# Altium PCB RF_Wattmeter.PcbDoc
Units mm, origin at the board's own origin, x right, y up, seen from the top; angles counter-clockwise.
Board outline 100.1 x 40.1 mm, 2 copper layers (Top Layer, Bottom Layer); 64 components, 40 nets, 196 pads, 267 vias.
Unrouted connection lines stored in the file: 4.
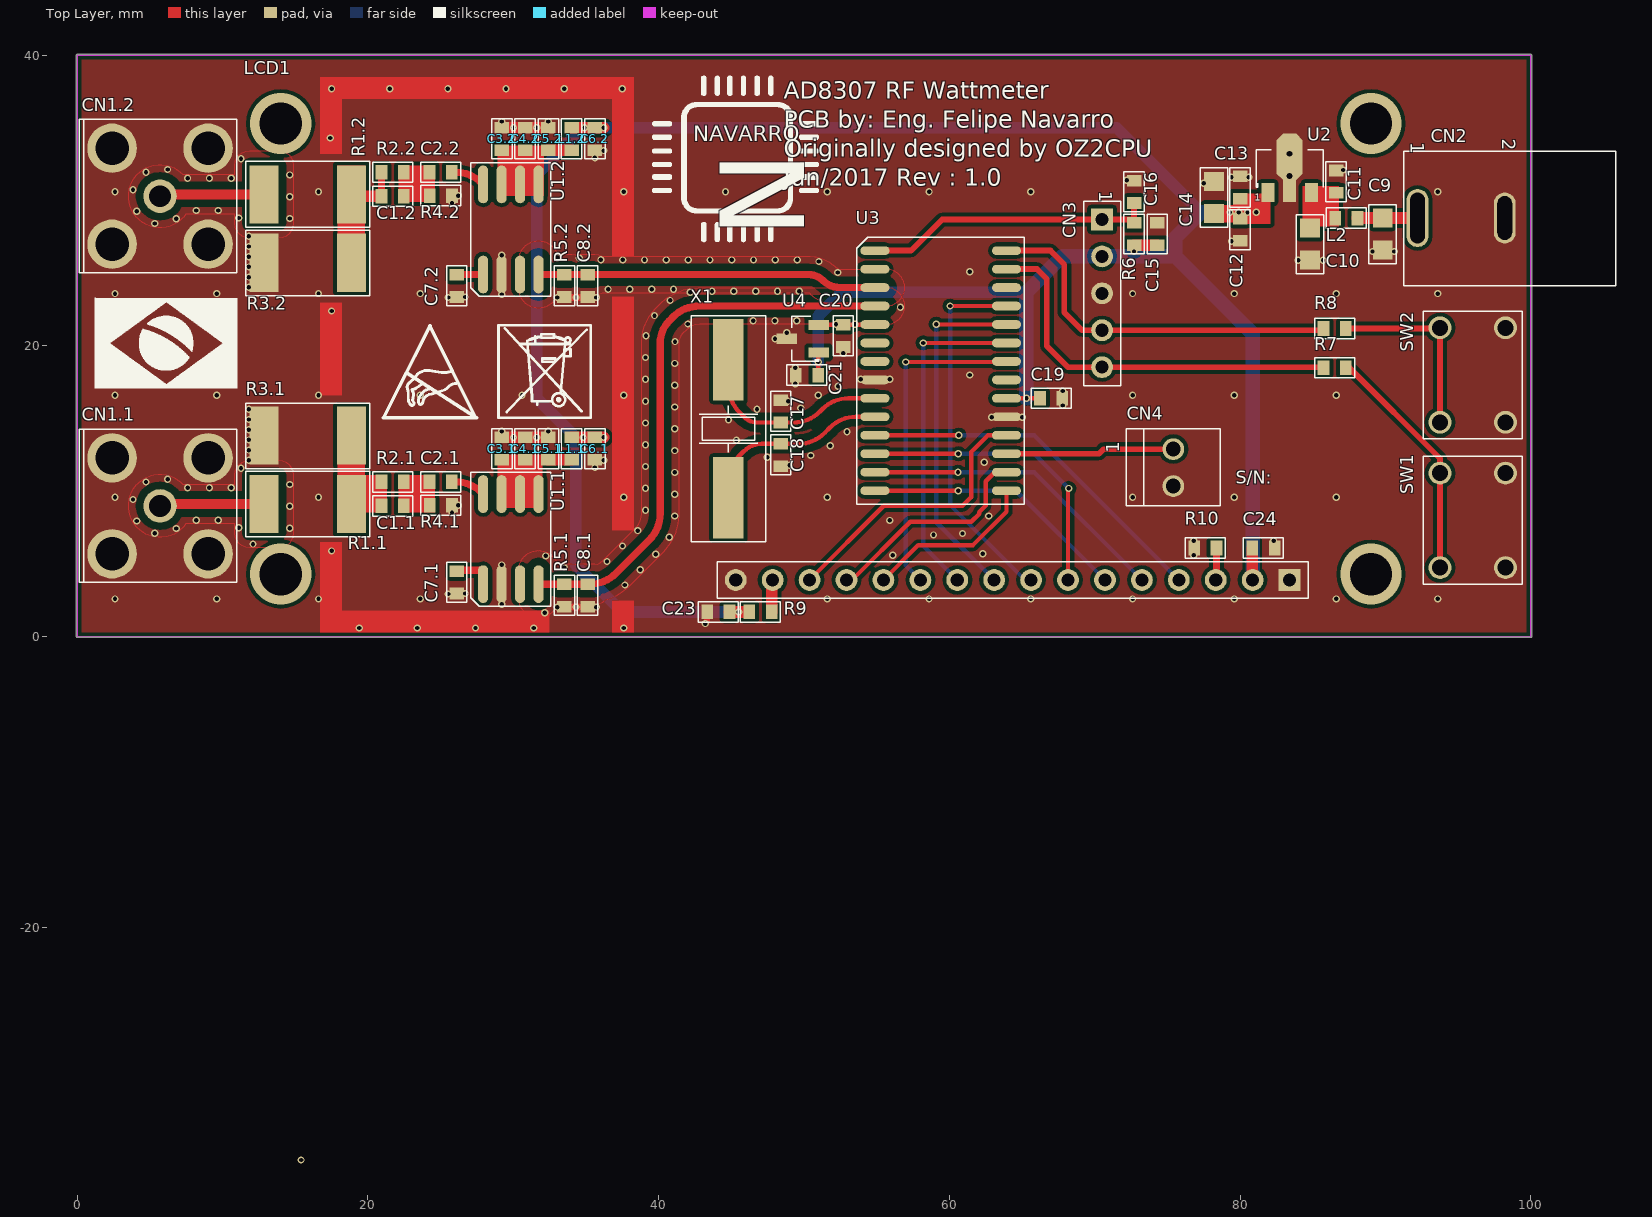
[diagram p0: Top Layer view]
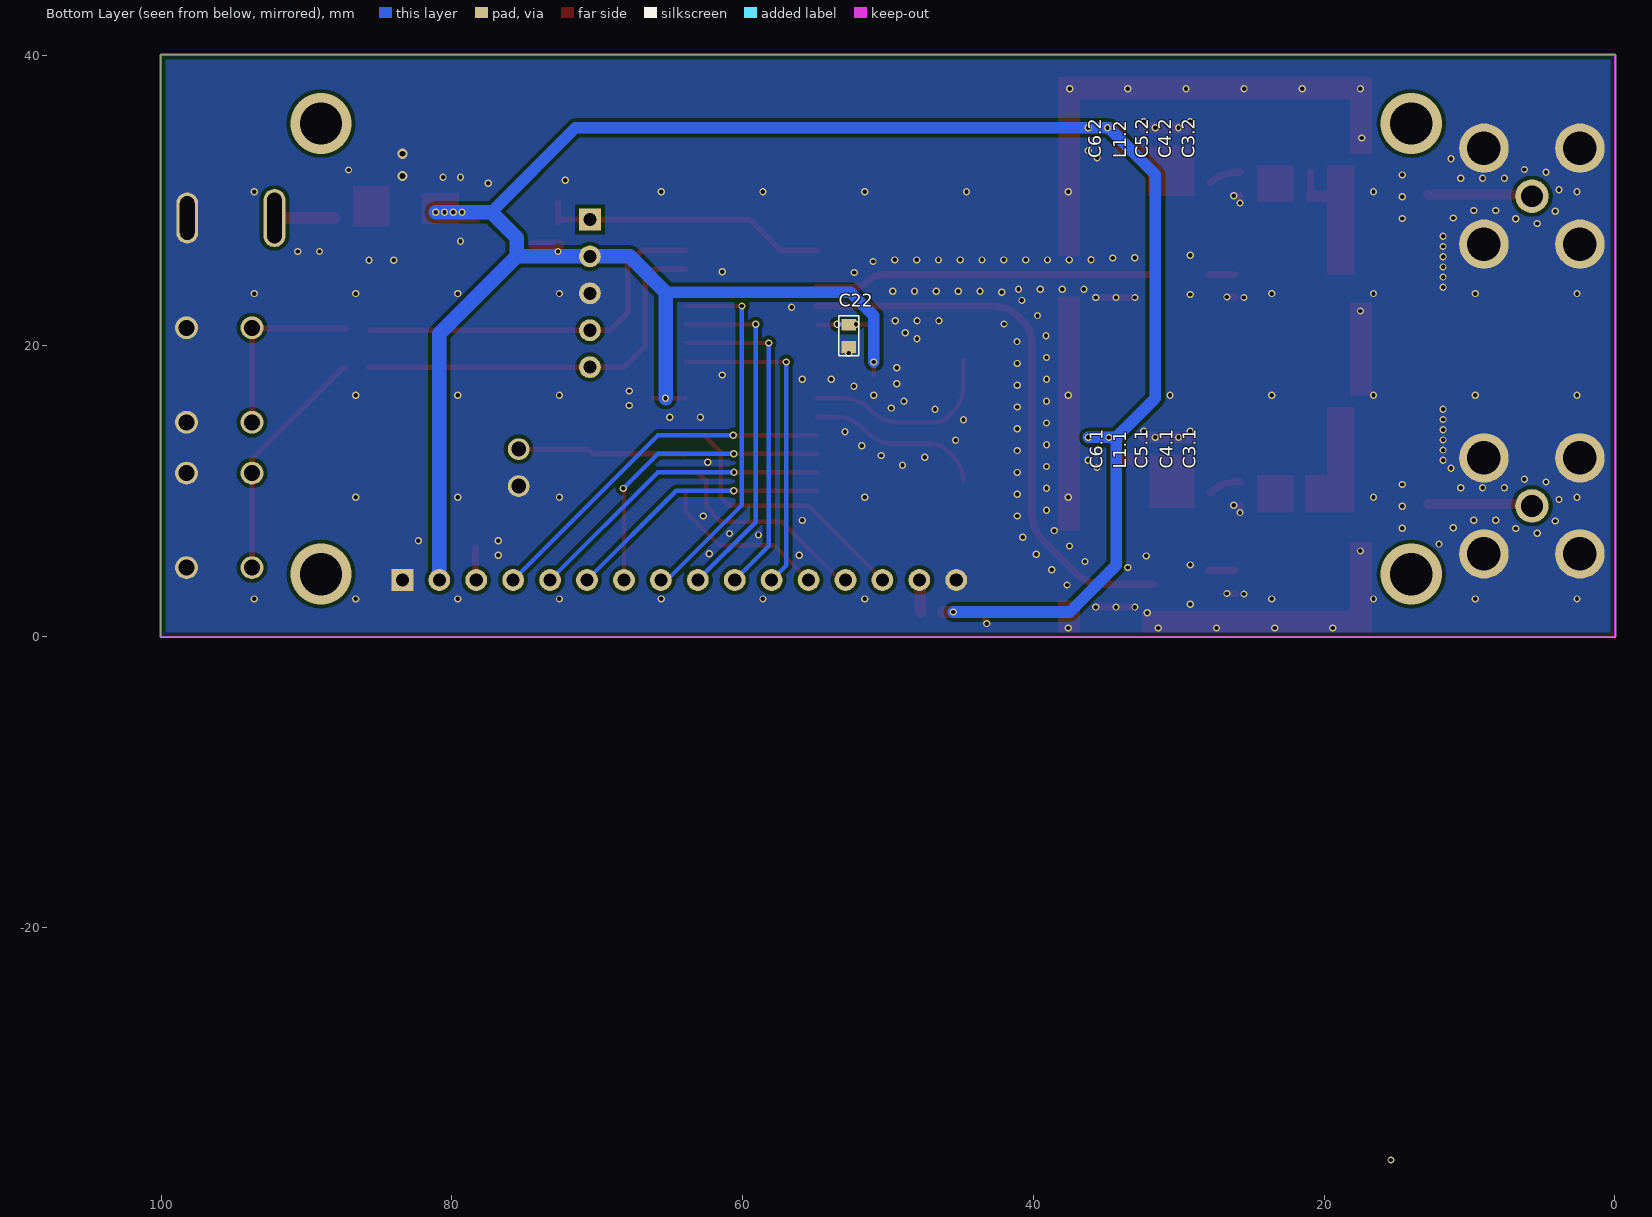
[diagram p1: Bottom Layer view, seen from below]

## Layer stack, top to bottom
Top Solder: solder mask 0.0102, Solder Resist, Dk 3.5
Top Layer: signal copper 0.0356
Dielectric 1: dielectric 0.32, FR-4, Dk 4.8
Bottom Layer: signal copper 0.0356
Bottom Solder: solder mask 0.0102, Solder Resist, Dk 3.5

## Board outline
0,-0.05 cw(c0,0) -0.05,0 -0.05,40 cw(c0,40) 0,40.05 100,40.05 cw(c100,40) 100.05,40 100.05,0 cw(c100,0) 100,-0.05

## Design rules (kind name [scope] priority, off if disabled: settings)
Clearance [All] p1: gap=0.254 ignorepadtopadclearanceinfootprint=FALSE except(0: Arc-Hole Track-Hole SMDPad-Hole THPad-Hole Via-Hole Fill-Hole Poly-Hole Region-Hole Text-Hole)
PolygonConnect [All] p1: connectstyle=Direct reliefconductorwidth=0.254 reliefentries=4 polygonreliefangle="90 Angle" airgapwidth=0.254
RoutingVias [All] p1: holewidth=0.711 width=1.27 viastyle="Through Hole" minholewidth=0.711 minwidth=1.27 maxholewidth=0.711 maxwidth=1.27
SolderMaskExpansion [All] p1: expansion=0.102
Width [All] p1: maxlimit=2 minlimit=0.254 preferedwidth=0.254
30 further rules are at their usual default settings.

## Classes and differential pairs
net class OUT[1..2]: OUT1 OUT2
component class PIC: C9 C10 C11 C12 C13 C14 C15 C16 C17 C18 C19 C20 C21 C22 C23 C24 CN2 CN3 CN4 L2 LCD1 R6 R7 R8 R9 R10 SW1 SW2 U2 U3 U4 X1
channel class AD8307: AD83071 AD83072
component class AD83072: C1.2 C2.2 C3.2 C4.2 C5.2 C6.2 C7.2 C8.2 CN1.2 L1.2 R1.2 R2.2 R3.2 R4.2 R5.2 U1.2
component class AD83071: C1.1 C2.1 C3.1 C4.1 C5.1 C6.1 C7.1 C8.1 CN1.1 L1.1 R1.1 R2.1 R3.1 R4.1 R5.1 U1.1

## Components (designator, comment, footprint, x,y, rotation, side; value= is the part's Value field where it differs from the comment)
C1.1 "Capacitor Cerâmico" CC0603 21.702,9 r0 top value=8.2pF (schematic designator C1)
C1.2 "Capacitor Cerâmico" CC0603 21.702,30.3 r0 top value=8.2pF (schematic designator C1)
C2.1 "Capacitor Cerâmico" CC0603 25.004,10.651 r0 top value=100nF (schematic designator C2)
C2.2 "Capacitor Cerâmico" CC0603 25.004,31.951 r0 top value=100nF (schematic designator C2)
C3.1 "Capacitor Cerâmico" CC0603 29.212,12.937 r270 top value=100nF (schematic designator C3)
C3.2 "Capacitor Cerâmico" CC0603 29.212,34.237 r270 top value=100nF (schematic designator C3)
C4.1 "Capacitor Cerâmico" CC0603 30.812,12.937 r270 top value=100nF (schematic designator C4)
C4.2 "Capacitor Cerâmico" CC0603 30.812,34.237 r270 top value=100nF (schematic designator C4)
C5.1 "Capacitor Cerâmico" CC0603 32.412,12.937 r270 top value=1nF (schematic designator C5)
C5.2 "Capacitor Cerâmico" CC0603 32.412,34.237 r270 top value=1nF (schematic designator C5)
C6.1 "Capacitor Cerâmico" CC0603 35.612,12.937 r90 top value=100nF (schematic designator C6)
C6.2 "Capacitor Cerâmico" CC0603 35.612,34.237 r90 top value=100nF (schematic designator C6)
C7.1 "Capacitor Cerâmico" CC0603 26.112,3.737 r90 top value=100nF (schematic designator C7)
C7.2 "Capacitor Cerâmico" CC0603 26.112,24.137 r90 top value=100nF (schematic designator C7)
C8.1 "Capacitor Cerâmico" CC0603 35.112,2.837 r90 top value=100nF (schematic designator C8)
C8.2 "Capacitor Cerâmico" CC0603 35.112,24.137 r90 top value=100nF (schematic designator C8)
C9 "Capacitor Cerâmico" CC0805 89.8,27.7 r90 top value=10uF
C10 "Capacitor Cerâmico" CC0805 84.8,27 r90 top value=10uF
C11 "Capacitor Cerâmico" CC0603 86.6,31.3 r270 top value=100nF
C12 "Capacitor Cerâmico" CC0603 80,28 r90 top value=100nF
C13 "Capacitor Cerâmico" CC0603 80,30.9 r270 top value=1uF
C14 "Capacitor Cerâmico" CC0805 78.2,30.2 r270 top value=10uF
C15 "Capacitor Cerâmico" CC0603 74.3,27.7 r270 top value=100nF
C16 "Capacitor Cerâmico" CC0603 72.7,30.6 r270 top value=100nF
C17 "Capacitor Cerâmico" CC0603 48.4,15.5 r270 top value=36pF
C18 "Capacitor Cerâmico" CC0603 48.4,12.5 r90 top value=36pF
C19 "Capacitor Cerâmico" CC0603 67,16.4 r180 top value=100nF
C20 "Capacitor Cerâmico" CC0603 52.7,20.7 r90 top value=100nF
C21 "Capacitor Cerâmico" CC0603 50.2,18 r0 top value=100nF
C22 "Capacitor Cerâmico" CC0603 52.7,20.7 r90 bottom value=100nF
C23 "Capacitor Cerâmico" CC0603 44.1,1.7 r0 top value=100nF
C24 "Capacitor Cerâmico" CC0603 81.6,6.1 r180 top value=100nF
CN1.1 "Conn BNC" "CONN BNC-JACK-TE-5-1634556-0" 5.7,9 r90 top value="Jack BNC" (schematic designator CN1)
CN1.2 "Conn BNC" "CONN BNC-JACK-TE-5-1634556-0" 5.7,30.3 r90 top value="Jack BNC" (schematic designator CN1)
CN2 "Jack-2Pol" CONN_JACK-FONTE 98.2,28.8 r270 top locked value="Receptáculo - 2Pol"
CN3 "ICS" "CONN HDR1X5" 70.5,28.7 r270 top value="Barra de 40 pinos - ATENÇÃO"
CN4 "Conector KK" "CONN HDR2-POL P.100" 75.4,12.9 r90 top value="Macho - 2 Polos"
L1.1 "Bead" CC0603 34.012,12.937 r90 top value=1K@100MHz (schematic designator L1)
L1.2 "Bead" CC0603 34.012,34.237 r90 top value=1K@100MHz (schematic designator L1)
L2 "Bead" CC0603 87.3,28.8 r180 top value=1K@100MHz
LCD1 "LCD1602" LCD-1602 51.5,19.8 r180 top locked value="Display LCD de LED"
R1.1 "Resistor" CC2512 15.86,9.127 r180 top value=33R (schematic designator R1)
R1.2 "Resistor" CC2512 15.86,30.427 r180 top value=33R (schematic designator R1)
R2.1 "Resistor" CC0603 21.702,10.651 r180 top value=68R (schematic designator R2)
R2.2 "Resistor" CC0603 21.702,31.951 r180 top value=68R (schematic designator R2)
R3.1 "Resistor" CC2512 15.86,13.828 r0 top value=33R (schematic designator R3)
R3.2 "Resistor" CC2512 15.86,25.728 r0 top value=33R (schematic designator R3)
R4.1 "Resistor" CC0603 25.012,9.037 r180 top value=47R (schematic designator R4)
R4.2 "Resistor" CC0603 25.012,30.337 r180 top value=47R (schematic designator R4)
R5.1 "Resistor" CC0603 33.512,2.837 r90 top value=470K (schematic designator R5)
R5.2 "Resistor" CC0603 33.512,24.137 r90 top value=470K (schematic designator R5)
R6 "Resistor" CC0603 72.7,27.7 r270 top value=10K
R7 "Resistor" CC0603 86.5,18.5 r0 top value=1K
R8 "Resistor" CC0603 86.5,21.2 r180 top value=1K
R9 "Resistor" CC0603 47,1.7 r180 top value=220R
R10 "Resistor" CC0603 77.6,6.1 r0 top value=100R
SW1 "Top Switch" SWITCH-TACTIL_6x6 96,8 r90 top value=NA
SW2 "Top Switch" SWITCH-TACTIL_6x6 96,18 r90 top value=NA
U1.1 "AD8307" SOIC-8N 29.83,6.714 r90 top value=Memória (schematic designator U1)
U1.2 "AD8307" SOIC-8N 29.83,28.014 r90 top value=Memória (schematic designator U1)
U2 "MC78L05A" SOT-89-3N 83.4,32.2 r90 top
U3 "PIC16F876A" SOIC-28N 59.4,18.3 r0 top
U4 "REF3325" SOT-23-3N 49.9,20.5 r180 top
X1 "4Mhz" HC/49US 44.8,14.3 r270 top value=20pF/40R

## Footprints (in the part's own frame and the unit in brackets; to place one, negate y for a bottom-side part, rotate by r counter-clockwise, add the part's x,y. Pads: shape width x height; smd on the part's side, far side on the other; paste and mask are expansions set on the pad)
CC0603 [mm] "Chip Resistor, 2-Leads, Body 1,6x0,8mm, IPC Medium Density"
  rect 0.8x1 smd: 1(-0.77,0) 2(0.77,0)
  silkscreen extent -1.38,-0.7 1.38,0.7, body extent -0.8,-0.42 0.8,0.43, height 0.45
CC0805 [mm] "Chip Resistor, 2-Leads, Body 2,0x1,2mm, IPC Medium Density"
  rect 1.3x1.35 smd: 1(-1.1,0) 2(1.1,0)
  silkscreen extent -2.05,-0.95 2.02,0.95, body extent -1,-0.62 1,0.63, height 0.6
CC2512 [mm] "Chip Resistor, 2-Leads, Body 6,5x3,3mm, IPC High Density"
  rect 2x4 smd: 1(-3,0) 2(3,0)
  silkscreen extent -4.26,-2.26 4.25,2.25, body extent -3.17,-1.6 3.18,1.6, height 0.47
"CONN BNC-JACK-TE-5-1634556-0" [mm]
  round 2.3 hole 1.5: 1(0,0)
  round 3.4 hole 2.3: 2(-3.3,-3.3) 2(-3.3,3.3) 2(3.3,-3.3) 2(3.3,3.3)
  silkscreen extent -5.26,-5.26 5.28,5.55, body extent -7.51,-5.09 7.29,22.74, height 11.71
"CONN HDR1X5" [mm] "Connector; Header; 5 Position, Pitch 2.54mm"
  rect 1.5x1.5 hole 0.9: 1(0,0)
  round 1.5 hole 0.9: 2(2.54,0) 3(5.08,0) 4(7.62,0) 5(10.16,0)
  silkscreen extent -1.27,-1.27 11.43,1.27, body extent -1.27,-1.27 11.43,1.27, height 8.51
"CONN HDR2-POL P.100" [mm] "Conector KK Macho, Pitch 2.54mm, 2 Polos"
  round 1.5 hole 1.02: 1(0,0) 2(-2.54,0)
  silkscreen extent -3.89,-3.23 1.4,3.25, body extent -3.82,-3.12 1.26,3.23, height 10.69
CONN_JACK-FONTE [mm]
  oval 4x1.5 hole 1 slot 3.5 at 0 deg: 1(0,-6)
  oval 3.5x1.5 hole 1 slot 3 at 0 deg: 2(0,0)
  silkscreen extent -4.59,-6.94 4.64,7.62, body extent -4.5,-6 4.5,7.73, height 11
HC/49US [mm] "Crystal, 2-Leads, Body 11,5x4,7mm, IPC Low Density"
  rect 5.6x2.1 smd: 1(-4.75,0) 2(4.75,0)
  silkscreen extent -7.77,-2.58 7.78,2.58, body extent -6.15,-2.25 6.15,2.25, height 5.18
LCD-1602 [mm]
  rect 1.5x1.5 hole 0.9: 1(-31.9,15.9)
  round 1.5 hole 0.9: 2(-29.36,15.9) 3(-26.82,15.9) 4(-24.28,15.9) 5(-21.74,15.9) 6(-19.2,15.9) 7(-16.66,15.9) 8(-14.12,15.9) 9(-11.58,15.9) 10(-9.04,15.9) 11(-6.5,15.9) 12(-3.96,15.9) 13(-1.42,15.9) 14(1.12,15.9) 15(3.66,15.9) 16(6.2,15.9)
  silkscreen extent -33.17,14.63 7.47,17.17, body extent -40,-18 40,18, height 20.7
SOIC-8N [mm] "SOIC, 8-Leads, Body 4.9x3.9mm, Pitch 1.27mm, IPC Medium Density"
  oval 2.6x0.7 smd: 1(-3.1,1.905) 2(-3.1,0.635) 3(-3.1,-0.635) 4(-3.1,-1.905) 5(3.1,-1.905) 6(3.1,-0.635) 7(3.1,0.635) 8(3.1,1.905)
  silkscreen extent -4.61,-2.73 4.6,2.76, body extent -2.9,-2.4 2.9,2.4, height 1.75
SOIC-28N [mm] "SOIC, 28-Leads, Body 18,1x7,6mm (max), Pitch 1,27mm, IPC High Density"
  oval 2x0.6 smd: 1(-4.525,8.255) 2(-4.525,6.985) 3(-4.525,5.715) 4(-4.525,4.445) 5(-4.525,3.175) 6(-4.525,1.905) 7(-4.525,0.635) 8(-4.525,-0.635) 9(-4.525,-1.905) 10(-4.525,-3.175) 11(-4.525,-4.445) 12(-4.525,-5.715) 13(-4.525,-6.985) 14(-4.525,-8.255) 15(4.525,-8.255) 16(4.525,-6.985) 17(4.525,-5.715) 18(4.525,-4.445) 19(4.525,-3.175) 20(4.525,-1.905) 21(4.525,-0.635) 22(4.525,0.635) 23(4.525,1.905) 24(4.525,3.175) 25(4.525,4.445) 26(4.525,5.715) 27(4.525,6.985) 28(4.525,8.255)
  silkscreen extent -5.77,-9.19 5.75,9.18, body extent -5.15,-8.95 5.15,8.95, height 2.65
SOT-23-3N [mm] "SOT23, 3-Leads, Body 3,1x2,7mm (max), Pitch 0,95mm, IPC Medium Density"
  rect 1.4x0.7 smd: 1(-1.1,0.95) 2(-1.1,-0.95) 3(1.1,0)
  silkscreen extent -1.1,-1.55 0.75,1.55, body extent -1.4,-1.45 1.4,1.45, height 1.25
SOT-89-3N [mm] "SOT89, 3-Leads, Body 4,5x2,4mm (max), Pitch 1,50mm, Lead Span 4,1mm, IPC High Density"
  rect 1.3x0.9 smd: 1(-1.65,1.5) 3(-1.65,-1.5)
  rect 1.5x0.9 smd: 2(-1.55,0)
  oct 3.2x1.8 smd: 2(0.8,0)
  silkscreen extent -1.3,-2.3 1.3,2.3, body extent -2.18,-2.25 1.75,2.25, height 1.4
SWITCH-TACTIL_6x6 [mm]
  round 1.575 hole 1.1 paste+0 mask+0.102: 1(-3.25,2.25) 2(3.25,2.25) 3(-3.25,-2.25) 4(3.25,-2.25)
  silkscreen extent -4.4,-3.4 4.4,3.4, body extent -3,-3 3,3, height 16.6

## Part data
C1.1 C1.2: library part "Cap 8.2nF 50V 0603 X7R", "Capacitor (Semiconductor SIM Model)", Supplier Part Number 1=1276-2119-1-ND, Tolerância=±10%, ChinesePrice=0,00200, Chinês=Local, ComponentLink1Description=Datasheet, ComponentLink1URL=D:\Tecnoclade\Datasheet\!DataMissing.pdf, Corrente=*A, Obs=X7R, Potência=*W, Supplier 1=Digi-Key, Tensão=50V
C2.1 C2.2 C3.1 C3.2 C4.1 C4.2 C6.1 C6.2 C7.1 C7.2 C8.1 C8.2 C11 C12 C15 C16 C19 C20 C21 C22 C23 C24: library part "Cap 100nF 50V 0603 X7R", "Capacitor (Semiconductor SIM Model)", Supplier Part Number 1=1276-1000-1-ND, Tolerância=±10%, ChinesePrice=0,00250, Chinês=Local, ComponentLink1Description=Datasheet, ComponentLink1URL=D:\Tecnoclade\Datasheet\!DataMissing.pdf, Corrente=*A, Obs=X7R, Potência=*W, Supplier 1=Digi-Key, Tensão=50V
C5.1 C5.2: library part "Cap 1nF 50V 0603 X7R", "Capacitor (Semiconductor SIM Model)", Supplier Part Number 1=1276-1916-1-ND, Tolerância=±10%, ChinesePrice=0,00000, Chinês=-----, ComponentLink1Description=Datasheet, ComponentLink1URL=D:\Tecnoclade\Datasheet\!DataMissing.pdf, Corrente=*A, Obs=X7R, Potência=*W, Supplier 1=Digi-Key, Tensão=50V
C9 C10 C14: library part "Cap 10uF 25V 0805 X5R", "Capacitor (Semiconductor SIM Model)", Supplier Part Number 1=587-2985-1-ND, Tolerância=±10%, ChinesePrice=0,02620, Chinês=Local, ComponentLink1Description=Datasheet, ComponentLink1URL=D:\Tecnoclade\Datasheet\!DataMissing.pdf, Corrente=*A, Obs=X5R, Potência=*W, Supplier 1=Digi-Key, Tensão=25V
C13: library part "Cap 1uF 50V 0603 X5R", "Capacitor (Semiconductor SIM Model)", Supplier Part Number 1=587-2400-1-ND, Tolerância=±10%, ChinesePrice=0,01100, Chinês=Local, ComponentLink1Description=Datasheet, ComponentLink1URL=D:\Tecnoclade\Datasheet\!DataMissing.pdf, Corrente=*A, Obs=X5R, Potência=*W, Supplier 1=Digi-Key, Tensão=50V
C17 C18: library part "Cap - $Val $V $Footprint $Classe_1", "Capacitor (Semiconductor SIM Model)", Supplier Part Number 1=1276-1187-1-ND, Tolerância=±*%, ChinesePrice=0,00000, Chinês=----, ComponentLink1Description=Datasheet, ComponentLink1URL=D:\Tecnoclade\Datasheet\!DataMissing.pdf, Corrente=*A, Potência=*W, Supplier 1=Digi-Key, Tensão=50v
CN1.1 CN1.2: "Conector BNC", Supplier Part Number 1=A97570-ND, ChinesePrice=0,00000, Chinês=----, ComponentLink1Description=Datasheet, ComponentLink1URL=D:\Tecnoclade\Datasheet\!DataMissing.pdf, Supplier 1=Digi-Key
CN2: "Jack Socket, Thru-Hole, Vertical, 2-Conductor Open Circuit", Supplier Part Number 1=CP-037A-ND, ChinesePrice=0,00000, Chinês=----, ComponentLink1Description=Datasheet, ComponentLink1URL=D:\Tecnoclade\Datasheet\!DataMissing.pdf, Supplier 1=Digi-Key
CN3: library part "Header 5 ICS", "Header, 5-Pin", Supplier Part Number 1=A26509-40-ND, ChinesePrice=0,10000, Chinês="Proved - Local", ComponentLink1Description=Datasheet, ComponentLink1URL=D:\Tecnoclade\Datasheet\!DataMissing.pdf, Supplier 1=Digi-Key
CN4: library part "KK 2P Macho-V P2.54mm", Supplier Part Number 1=A19423-ND, ChinesePrice=0,01400, Chinês=Local, ComponentLink1Description=Datasheet, ComponentLink1URL=D:\Tecnoclade\Datasheet\!DataMissing.pdf, Supplier 1=Digi-Key
L1.1 L1.2 L2: library part "Bd 1K@100MHz 0603 400mA", Supplier Part Number 1=445-1550-1-ND, Tolerância=±25%, ChinesePrice=0,00000, Chinês=-----, ComponentLink1Description=Datasheet, ComponentLink1URL=D:\Tecnoclade\Datasheet\!DataMissing.pdf, Corrente=400mA, Obs="Ferrite (0R5)", Substituição=27/06/2014, Supplier 1=Digi-Key
LCD1: "LCD Generico 16 caracteres X 2 linhas", Supplier Part Number 1=--LCD, ChinesePrice=0,00000, Chinês=----, ComponentLink1Description=Datasheet, ComponentLink1URL=D:\Tecnoclade\Datasheet\, Obs="BackLigth = 3V ~ 11V (5V recomendado)", Supplier 1=Digi-Key, Tensão="-0V3 ~ 7V"
R1.1 R1.2 R3.1 R3.2: library part "Res 33R 1% 0603 1/10W", Supplier Part Number 1=RMCF2512JT33R0CT-ND, Tolerância=±1%, ChinesePrice=0,00000, Chinês=----, ComponentLink1Description=Datasheet, ComponentLink1URL=D:\Tecnoclade\Datasheet\!DataMissing.pdf, Corrente=*A, Obs=±100ppm/ºC, Potência=1W, Supplier 1=Digi-Key, Tensão=*V
R2.1 R2.2 R4.1 R4.2 R7 R8: library part "Res 1K 1% 0603 1/10W", Supplier Part Number 1=RMCF0603FT1K00CT-ND, Tolerância=±1%, ChinesePrice=0,00089, Chinês=Local, ComponentLink1Description=Datasheet, ComponentLink1URL=D:\Tecnoclade\Datasheet\!DataMissing.pdf, Corrente=*A, Potência=1/10W, Supplier 1=Digi-Key, Tensão=*V
R5.1 R5.2: library part "Res 470K 1% 0603 1/10W", Supplier Part Number 1=RMCF0603FT470KCT-ND, Tolerância=±1%, ChinesePrice=0,00000, Chinês=----, ComponentLink1Description=Datasheet, ComponentLink1URL=D:\Tecnoclade\Datasheet\!DataMissing.pdf, Corrente=*A, Obs=±100ppm/ºC, Potência=1/10W, Supplier 1=Digi-Key, Tensão=*V
R6: library part "Res 10K 1% 0603 1/10W", Supplier Part Number 1=P10.0KHCT-ND, Tolerância=±1%, ChinesePrice=0,00089, Chinês=Local, ComponentLink1Description=Datasheet, ComponentLink1URL=D:\Tecnoclade\Datasheet\!DataMissing.pdf, Corrente=*A, Potência=1/10W, Supplier 1=Digi-Key, Tensão=*V
R9 R10: library part "Res 220R 1% 0603 1/10W", Supplier Part Number 1=RMCF0603FT220RCT-ND, Tolerância=±1%, ChinesePrice=0,00000, Chinês=----, ComponentLink1Description=Datasheet, ComponentLink1URL=D:\Tecnoclade\Datasheet\!DataMissing.pdf, Corrente=*A, Obs=±100ppm/ºC, Potência=1/10W, Supplier 1=Digi-Key, Tensão=*V
SW1 SW2: library part "SW-SPST Tactil", "Single-Pole, Single-Throw Switch", Supplier Part Number 1=450-1642-ND, ChinesePrice=0,03000, Chinês=Local, ComponentLink1Description=Datasheet, ComponentLink1URL=D:\Tecnoclade\Datasheet\!DataMissing.pdf, Corrente=50mA, Obs="Atuador = 13mm(h) X 6mm (dia)", Supplier 1=Digi-Key, Tensão=12V
U1.1 U1.2: "Low Cost, DC to 500 MHz, 92 dB Log Amp", Supplier Part Number 1=AD8307ARZ-REELCT-ND, ChinesePrice=1,94000, Chinês=Local, ComponentLink1Description=Datasheet, ComponentLink1URL=D:\Tecnoclade\Datasheet\!DataMissing.pdf, Supplier 1=Digi-Key
U2: library part MC78L05, "Regulador Linear 5V", Supplier Part Number 1=MC78L05ACHXCT-ND, ChinesePrice=0,00000, Chinês=-----, ComponentLink1Description=Datasheet, ComponentLink1URL=D:\Tecnoclade\Datasheet\, Corrente=100mA, Supplier 1=Digi-Key, Tensão=5V
U3: "Microcontrolador PIC", Supplier Part Number 1=PIC16F876A-I/SO-ND, ChinesePrice=0,00000, Chinês=----, ComponentLink1Description=Datasheet, ComponentLink1URL=http://ww1.microchip.com/downloads/en/DeviceDoc/40001579E.pdf, Supplier 1=Digi-Key, Tensão="2V3 ~ 5V5"
U4: "IC VREF SERIES 2.5V", Supplier Part Number 1=296-22641-1-ND, Supplier 1=Digi-Key
X1: library part XTAL, "Crystal Oscillator", Supplier Part Number 1=535-10226-1-ND, ChinesePrice=0,00000, Chinês=----, Supplier 1=Digi-Key

## Via types
v1: diameter 0.5, hole 0.3, Top Layer to Bottom Layer, tented both sides, 261 vias
v2: diameter 4.2, hole 2.9, Top Layer to Bottom Layer, 4 vias
v3: diameter 0.7, hole 0.4, Top Layer to Bottom Layer, tented both sides, 2 vias

## Nets (pads, with @x,y where several pads share a name; then routed paths per layer and width w, separated by ;. In a path a pad name is that pad's centre, name@x,y a point inside that pad or via, vN(x,y) a via of type N, cw(c..) or ccw(c..) an arc to the next point about the centre after c; other vN are vias at no path point)
2V5: C20.2 C22.2 U3.5 U4.2 | length 4.7
  Top Layer w0.3: U4.2 U3.5@54.85,21.45
  Bottom Layer w0.3: C22.2 52.7,21.5 v1(53.5,21.5)
  other v1: 52.2,21.5
5V: C6.1.2 C6.2.2 C12.2 C13.2 C14.2 C15.2 C19.2 C21.2 C23.2 C24.2 CN3.2 L1.1.2 L1.2.2 LCD1.2 R6.2 R9.2 U2.1 U3.20 U4.1 | length 177.2
  Top Layer w0.3: C21.2 v1(50.97,18.9) U4.1@50.97,19.52 ; U3.20@63.93,16.4 v1(65.3,16.4) C19.2
  Top Layer w0.8: L1.1.2 C6.1.2 v1(36.212,13.707) ; L1.2.2 v1(36.212,35.007) ; C23.2 R9.2 ; R6.2 C15.2 ; C14.2 81.35,29.1 ; LCD1.2@80.83,3.93 C24.2
  Bottom Layer w0.8: v1(36.212,13.707) 34.293,13.707 ; v1(45.5,1.7) 37.5,1.7 34.293,4.907 34.293,13.707 ; v1(50.97,18.9) 50.97,22.07 52.6,23.7 65.3,23.7 ; 77.3,29.2 71.493,35.007 v1(36.212,35.007) 34.812,35.007 31.6,31.795 31.6,16.4 34.293,13.707
  Bottom Layer w1: v1(65.3,16.4) 65.3,23.7 67.76,26.16 CN3.2 75.54,26.16 ; LCD1.2 80.86,20.84 75.54,26.16 ; v1(81.1,29.2) v1(80.5,29.2) v1(79.9,29.2) v1(79.3,29.2) 77.3,29.2 75.54,27.44 75.54,26.16
  other v1: 34.8,13.7 72.7,26.5 34.9,35.007
D0: LCD1.7 U3.12 | length 20.6
  Top Layer w0.3: U3.12 v1(60.615,12.585) ; LCD1.7 v1@68.16,10.16
  Bottom Layer w0.3: v1(60.615,12.585) 65.815,12.585 v1(68.2,10.2)
D1: LCD1.8 U3.25 | length 25.3
  Top Layer w0.3: v1(60.045,22.745) U3.25
  Bottom Layer w0.3: v1(60.045,22.745) 60.045,9.055 65.2,3.9 LCD1.8
D2: LCD1.9 U3.24 | length 24.1
  Top Layer w0.3: v1@59.1,21.475 U3.24
  Bottom Layer w0.3: v1(59.1,21.5) 59.1,7.88 LCD1.9
D3: LCD1.10 U3.23 | length 23
  Top Layer w0.3: v1(58.2,20.205) U3.23
  Bottom Layer w0.3: v1(58.2,20.205) 58.2,6.24 LCD1.10
D4: LCD1.11 U3.22 | length 22.4
  Top Layer w0.3: v1(57,18.9) 63.89,18.9 U3.22
  Bottom Layer w0.3: v1(57,18.9) 57,4.9 LCD1.11
D5: LCD1.12 U3.15 | length 11.9
  Top Layer w0.3: LCD1.12 57.86,6.3 61.625,6.3 63.925,8.6 U3.15
D6: LCD1.13 U3.16 | length 15.1
  Top Layer w0.3: LCD1.13 53.3,3.9 57.3,7.9 61.5,7.9 62.046,8.446 62.046,8.571 62.5,9.025 62.5,10.7 63.115,11.315 U3.16
D7: LCD1.14 U3.18 | length 19.5
  Top Layer w0.3: LCD1.14 55.48,9 60.9,9 61.5,9.6 61.5,12.7 62.655,13.855 U3.18
EN: LCD1.6 U3.14 | length 18.4
  Top Layer w0.3: U3.14 v1(60.6,10.045)
  Bottom Layer w0.3: v1(60.6,10.045) 64.555,10.045 LCD1.6
GND: C3.1.1 C3.2.1 C4.1.1 C4.2.1 C5.1.1 C5.2.1 C6.1.1 C6.2.1 C7.1.1 C7.2.1 C8.1.1 C8.2.1 C9.1 C10.1 C11.1 C12.1 C13.1 C14.1 C15.1 C16.1 C17.1 C18.1 C19.1 C20.1 C21.1 C22.1 C23.1 C24.1 CN1.1.2 CN1.2.2 CN2.2 CN3.3 CN4.2 LCD1.1 LCD1.16 R3.1.1 R3.2.1 R4.1.1 R4.2.1 R5.1.1 R5.2.1 R10.1 SW1.3 SW1.4 SW2.3 SW2.4 U1.1.2 U1.2.2 U2.2 U3.8 U3.19 U4.3 | length 15.2
  Top Layer w0.4: v1(43.2,0.9) 43.33,1.03 C23.1
  Top Layer w0.5: v1(25.782,8.537) R4.1.1 ; v1(25.782,29.837) R4.2.1 ; C7.1.1 v1(26.682,2.967) ; C7.2.1 v1(26.682,23.367) ; v1(33.012,2.037) v1(35.712,2.037) ; v1(33.012,23.337) v1(35.712,23.337)
  Top Layer w0.8: C3.1.1 C4.1.1 C5.1.1 ; C3.2.1 C5.2.1
  Bottom Layer w0.3: v1(52.7,19.5) C22.1
  other v1: 19.4,0.6 23.4,0.6 27.4,0.6 31.4,0.6 37.6,0.6 32.161,1.641 34.312,2.037 29.212,2.237 2.6,2.6 9.6,2.6 16.6,2.6 23.6,2.6 51.6,2.6 58.6,2.6 65.6,2.6 72.6,2.6 79.6,2.6 86.6,2.6 93.6,2.6 25.512,2.937 37.675,3.551 38.739,4.609 33.504,4.763 29.212,4.937 36.446,5.176 32.23,5.556 56.1,5.6 76.8,5.6 39.8,5.67 62.3,5.7 17.5,5.9 37.507,6.237 12.092,6.371 76.8,6.6 82.3,6.6 40.727,6.848 58.9,7 5.341,7.124 60.9,7.1 38.567,7.298 6.806,7.446 14.616,7.466 11.104,7.499 4.095,7.96 8.195,8.014 9.695,8.014 55.9,8 41.105,8.3 62.7,8.3 39.089,8.704 14.616,8.966 26.212,9.037 3.84,9.438 2.6,9.6 16.6,9.6 37.6,9.6 51.6,9.6 72.6,9.6 79.6,9.6 86.6,9.6 41.111,9.8 39.089,10.204 7.593,10.24 9.093,10.24 10.593,10.24 14.616,10.466 4.73,10.645 6.217,10.839 41.111,11.3 11.264,11.582 35.612,11.637 39.089,11.704 49,11.8 62.4,12 11.812,12.137 36.212,12.137 47.465,12.351 50.46,12.468 41.111,12.8 11.812,12.837 51.8,13.142 39.089,13.204 45.347,13.521 11.812,13.537 30.012,13.707 31.612,13.707 52.958,14.096 29.212,14.137 32.412,14.137 11.812,14.237 41.111,14.3 39.089,14.704 44.801,14.918 11.812,14.937 62.9,15.1 65,15.1 11.812,15.637 46.767,15.65 49.765,15.724 41.111,15.8 67.8,15.9 39.089,16.204 48.9,16.2 2.6,16.6 9.6,16.6 16.6,16.6 23.6,16.6 30.6,16.6 37.6,16.6 50.972,16.615 72.6,16.6 79.6,16.6 86.6,16.6 67.8,16.9 52.34,17.23 41.111,17.3 49.4,17.4 39.089,17.704 53.9,17.7 55.9,17.7 61.4,18 49.4,18.5 41.111,18.8 39.089,19.204 41.123,20.3 48,20.5 39.128,20.704 48.8,20.9 42.011,21.509 46.494,21.734 47.994,21.734 49.494,21.734 39.708,22.087 17.5,22.4 56.629,22.663 40.785,23.131 25.512,23.337 34.312,23.337 29.212,23.537 2.6,23.6 9.6,23.6 16.6,23.6 23.6,23.6 72.6,23.6 79.6,23.6 86.6,23.6 93.6,23.6 42.172,23.702 43.671,23.756 45.171,23.756 46.671,23.756 48.171,23.756 49.671,23.756 36.518,23.896 38.018,23.896 39.518,23.896 41.018,23.896 11.812,24.037 11.812,24.737 52.316,25.049 61.4,25.1 11.812,25.437 51.022,25.807 37.526,25.918 39.026,25.918 40.526,25.918 42.026,25.918 43.526,25.918 45.026,25.918 46.526,25.918 48.026,25.918 49.526,25.918 84,25.9 85.7,25.9 36.026,25.934 33.031,26.063 34.531,26.053 11.812,26.137 29.212,26.237 89.1,26.5 90.6,26.5 11.812,26.837 79.4,27.2 11.812,27.537 5.341,28.424 6.806,28.746 14.616,28.766 11.104,28.799 4.095,29.26 8.195,29.314 9.695,29.314 14.616,30.266 26.212,30.337 2.6,30.6 16.6,30.6 37.6,30.6 44.6,30.6 51.6,30.6 58.6,30.6 65.6,30.6 93.6,30.6 3.84,30.738 77.5,31.2 72.2,31.4 7.593,31.54 9.093,31.54 10.593,31.54 79.4,31.6 80.6,31.6 14.616,31.766 4.73,31.945 87.1,32.1 6.217,32.139 11.264,32.882 35.612,32.937 36.212,33.437 17.4,34.3 30.012,35.007 31.612,35.007 29.212,35.437 32.412,35.437 17.5,37.7 21.5,37.7 25.5,37.7 29.5,37.7 33.5,37.7 37.5,37.7
  other v3: 83.4,31.7 83.4,33.22
MCLR: C16.2 CN3.1 R6.1 U3.1 | length 20.2
  Top Layer w0.4: U3.1 57.355,26.555 59.5,28.7 CN3.1 72.47,28.7 R6.1 C16.2
NetC1.1_1: C1.1.1 R1.1.1 R2.1.2 R3.1.2 | length 3.8
  Top Layer w0.5: R1.1.1 ccw(c19.167,9.434) 19.167,9 C1.1.1 R2.1.2
NetC1.1_2: C1.1.2 C2.1.1 R2.1.1 R4.1.2
NetC1.2_1: C1.2.1 R1.2.1 R2.2.2 R3.2.2 | length 3.8
  Top Layer w0.5: R1.2.1 ccw(c19.167,30.734) 19.167,30.3 C1.2.1 R2.2.2
NetC1.2_2: C1.2.2 C2.2.1 R2.2.1 R4.2.2
NetC2.1_2: C2.1.2 U1.1.8 | length 2.3
  Top Layer w0.5: C2.1.2 26.036,10.651 cw(c26.036,8.111) U1.1.8@27.832,9.907
NetC2.2_2: C2.2.2 U1.2.8 | length 2.3
  Top Layer w0.5: C2.2.2 26.036,31.951 cw(c26.036,29.411) U1.2.8@27.832,31.207
NetC3.1_2: C3.1.2 C4.1.2 C5.1.2 L1.1.1 U1.1.5 U1.1.6 U1.1.7 | length 1.6
  Top Layer w0.8: C5.1.2 L1.1.1
NetC3.2_2: C3.2.2 C4.2.2 C5.2.2 L1.2.1 U1.2.5 U1.2.6 U1.2.7 | length 1.6
  Top Layer w0.8: C5.2.2 L1.2.1
NetC7.1_2: C7.1.2 U1.1.1 | length 1.8
  Top Layer w0.5: C7.1.2@26.128,4.578 U1.1.1@27.934,4.578
NetC7.2_2: C7.2.2 U1.2.1 | length 1.8
  Top Layer w0.5: C7.2.2@26.119,24.914 U1.2.1
NetC9_2: C9.2 CN2.1 L2.1 | length 4.1
  Top Layer w0.8: L2.1 C9.2 CN2.1
NetC10_2: C10.2 C11.2 L2.2 U2.3
NetCN1.1_1: CN1.1.1 R1.1.2 | length 7.2
  Top Layer w0.5: CN1.1.1 cw(c6.007,8.693) CN1.1.1@6.007,9.127
  Top Layer w0.7: CN1.1.1@6.007,9.127 R1.1.2
NetCN1.2_1: CN1.2.1 R1.2.2 | length 7.2
  Top Layer w0.5: CN1.2.1 cw(c6.007,29.993) CN1.2.1@6.007,30.427
  Top Layer w0.7: CN1.2.1@6.007,30.427 R1.2.2
NetLCD1_3: LCD1.3 R10.2 | length 2.2
  Top Layer w0.5: LCD1.3@78.37,3.95 R10.2
NetLCD1_15: LCD1.15 R9.1 | length 2.1
  Top Layer w0.8: R9.1 LCD1.15@47.77,3.83
NetR7_2: R7.2 SW1.1 SW1.2 | length 16.6
  Top Layer w0.4: R7.2 87.5,18.5 93.75,12.25 SW1.2 SW1.1
NetR8_1: R8.1 SW2.1 SW2.2 | length 13
  Top Layer w0.4: R8.1 SW2.2@93.75,21.2 ; SW2.1 SW2.2@93.75,21.2 ; SW2.2 SW2.2@93.75,21.2
OUT1: C8.1.2 R5.1.2 U1.1.4 U3.4 | length 38.7
  Top Layer w0.5: U1.1.4 35.262,3.614 ccw(c35.262,6.154) 37.058,4.358 39.356,6.656 ccw(c37.56,8.452) 40.1,8.452 40.1,20.2 cw(c42.273,20.2) 40.736,21.736 41.001,22.001 cw(c42.797,20.205) 42.797,22.745 U3.4
OUT2: C8.2.2 R5.2.2 U1.2.4 U3.3 | length 23.4
  Top Layer w0.5: U1.2.4 R5.2.2@33.512,24.914 ; R5.2.2 C8.2.2 50.317,24.907 cw(c50.317,23.517) 51.3,24.5 ccw(c52.471,25.671) 52.471,24.015 U3.3
PGC: CN3.5 R7.1 U3.27 | length 27.3
  Top Layer w0.4: U3.27 66.015,25.285 66.7,24.6 66.7,20 68.16,18.54 CN3.5 R7.1@85.69,18.54
PGD: CN3.4 R8.2 U3.28 | length 25.9
  Top Layer w0.4: U3.28 66.945,26.555 67.9,25.6 67.9,22.3 69.12,21.08 CN3.4 R8.2@85.61,21.08
RS: LCD1.4 U3.11 | length 25
  Top Layer w0.3: U3.11 v1(60.645,13.855)
  Bottom Layer w0.3: v1(60.645,13.855) 65.825,13.855 LCD1.4
RW: LCD1.5 U3.13 | length 21.4
  Top Layer w0.3: U3.13 v1(60.585,11.315)
  Bottom Layer w0.3: v1@60.599,11.315 65.825,11.315 LCD1.5
TX: CN4.1 U3.17 | length 11.6
  Top Layer w0.4: U3.17 70.285,12.585 70.6,12.9 CN4.1
X1: C17.2 U3.9 X1.1 | length 13.8
  Top Layer w0.3: X1.1 44.8,17.252 ccw(c47.34,17.252) 45.544,15.456 45.9,15.1 ccw(c46.793,15.993) 46.793,14.73 C17.2 49.278,14.73 ccw(c49.278,17.27) 51.074,15.474 51.251,15.651 cw(c53.047,13.855) 53.047,16.395 U3.9
X2: C18.2 U3.10 X1.2 | length 12.1
  Top Layer w0.3: X1.2@44.8,10.648 cw(c47.34,10.648) 45.544,12.444 45.854,12.754 cw(c47.1,11.508) 47.1,13.27 C18.2 49.618,13.27 ccw(c49.618,15.81) 51.414,14.014 51.8,14.4 cw(c53.55,12.65) 53.55,15.125 U3.10
pads on no net: U1.1.3 U1.2.3 U3.2 U3.6 U3.7 U3.21 U3.26
copper on no net:
  other v1: 15.4,-36
  other v2: 14,4.3 89,4.3 14,35.3 89,35.3

## Polygon pours and split planes (outlines as drawn)
GND on Bottom Layer "Top Layer-No Net" (solid, remove dead copper, pour order 0): 0,0 0,40 100,40 100,0
GND on Top Layer "Top Layer-GND 4" (solid, pour order 22): 230 vertices, not listed, extent 43.624,11.277 56.042,18.42
GND on Top Layer "Top Layer-GND 3" (solid, pour order 10): 14.122,33.406 14.367,33.305 14.577,33.144 14.738,32.934 14.839,32.689 14.874,32.427 14.874,28.427 14.839,28.165 14.738,27.92 14.577,27.71 14.367,27.549 14.122,27.448 13.86,27.413 11.86,27.413 11.598,27.448 11.353,27.549 11.143,27.71 10.982,27.92 10.881,28.165 10.846,28.427 10.846,29.056 7.473,29.056 7.325,28.863 7.231,28.769 7.137,28.675 6.897,28.491 6.668,28.359 6.388,28.243 6.27,28.211 6.133,28.174 5.832,28.135 5.568,28.135 5.268,28.174 5.131,28.211 5.012,28.243 4.732,28.359 4.542,28.469 4.503,28.491 4.263,28.675 4.169,28.769 4.076,28.863 3.891,29.103 3.759,29.332 3.643,29.612 3.575,29.867 3.535,30.168 3.535,30.432 3.575,30.732 3.593,30.801 3.643,30.988 3.759,31.268 3.891,31.497 4.076,31.737 4.169,31.831 4.263,31.924 4.503,32.109 4.732,32.241 5.012,32.357 5.131,32.389 5.268,32.425 5.568,32.465 5.832,32.465 6.133,32.425 6.27,32.389 6.388,32.357 6.668,32.241 6.858,32.131 6.897,32.109 7.137,31.924 7.231,31.831 7.264,31.798 10.846,31.798 10.846,32.427 10.881,32.689 10.982,32.934 11.143,33.144 11.353,33.305 11.598,33.406 11.86,33.441 13.86,33.441
GND on Top Layer "Top Layer-GND 2" (solid, pour order 8): 225 vertices, not listed, extent 30.364,22.596 56.892,27.232
GND on Top Layer "Top Layer-GND 1" (solid, pour order 6): 271 vertices, not listed, extent 30.364,1.296 56.892,24.065
GND on Top Layer "Top Layer-GND" (solid, pour order 4): 14.122,12.106 14.367,12.005 14.577,11.844 14.738,11.634 14.839,11.389 14.874,11.127 14.874,7.127 14.839,6.865 14.738,6.62 14.577,6.41 14.367,6.249 14.122,6.148 13.86,6.113 11.86,6.113 11.598,6.148 11.353,6.249 11.143,6.41 10.982,6.62 10.881,6.865 10.846,7.127 10.846,7.756 7.473,7.756 7.325,7.563 7.231,7.469 7.137,7.375 6.897,7.191 6.668,7.059 6.388,6.943 6.27,6.911 6.133,6.874 5.832,6.835 5.568,6.835 5.268,6.874 5.131,6.911 5.012,6.943 4.732,7.059 4.542,7.169 4.503,7.191 4.263,7.375 4.169,7.469 4.076,7.563 3.891,7.803 3.759,8.032 3.643,8.312 3.575,8.567 3.535,8.868 3.535,9.132 3.575,9.432 3.593,9.501 3.643,9.688 3.759,9.968 3.891,10.197 4.076,10.437 4.169,10.531 4.263,10.624 4.503,10.809 4.732,10.941 5.012,11.057 5.131,11.089 5.268,11.125 5.568,11.165 5.832,11.165 6.133,11.125 6.27,11.089 6.388,11.057 6.668,10.941 6.858,10.831 6.897,10.809 7.137,10.624 7.231,10.531 7.264,10.498 10.846,10.498 10.846,11.127 10.881,11.389 10.982,11.634 11.143,11.844 11.353,12.005 11.598,12.106 11.86,12.141 13.86,12.141
GND on Top Layer "Top Layer-No Net" (solid, remove dead copper, pour order 2): 0,0 0,40 100,40 100,0

## Keep-outs
Keep-Out Layer:
  lines w0.1: 0,0 0,40 100,40 100,0 0,0

## Other copper
Top Layer:
  region net GND: 32.5,1.8 18.2,1.8 18.2,0.3 32.5,0.3
  region net GND: 18.2,33.2 18.2,37 16.7,37 16.7,33.2
  region net GND: 18.2,0.3 18.2,6.5 16.7,6.5 16.7,0.3
  region net GND: 18.2,16.6 18.2,23 16.7,23 16.7,16.6
  region net GND: 38.3,0.3 38.3,2.5 36.8,2.5 36.8,0.3
  region net GND: 38.3,7.3 38.3,23.4 36.8,23.4 36.8,7.3
  region net GND: 36.8,37 36.8,26.2 38.3,26.2 38.3,37
  rectangle net GND: 16.7,37 38.3,38.5
  rectangle net NetC1.2_1: 19.4,29.9 21.2,30.7
  rectangle net NetC1.2_1: 17.9,24.9 19.8,32.4
  rectangle net NetC1.2_2: 22.1,29.9 24.6,32.4
  rectangle net NetC3.2_2: 28.9,30.3 32.1,33.8
  rectangle net NetC1.1_1: 22.112,8.537 24.612,11.137
  rectangle net NetC3.1_2: 28.912,8.837 32.012,12.537
  rectangle net NetC1.1_1: 17.912,8.537 19.812,15.8
  rectangle net NetC1.1_1: 18.912,8.537 21.312,11.137
  rectangle net 5V: 79.5,28.4 82.1,30.5
  rectangle net 5V: 78.1,28.5 80.4,29.7
  rectangle net NetC10_2: 84.3,28.2 86.8,31
  pour cut-out: 52.969,15.729 52.68,15.701 52.327,15.594 52.002,15.42 51.77,15.23 52.091,15.426 52.129,15.44 52.162,15.462 52.543,15.62 52.583,15.628 52.619,15.645
  pour cut-out: 265 vertices and 0 holes, not listed, extent 44.133,11.777 55.542,17.919
  pour cut-out: 14.053,11.593 14.217,11.484 14.326,11.32 14.365,11.127 14.365,7.127 14.326,6.934 14.217,6.77 14.053,6.661 13.86,6.622 11.86,6.622 11.667,6.661 11.503,6.77 11.394,6.934 11.355,7.127 11.355,8.266 7.187,8.266 7.171,8.227 7.134,8.172 7.105,8.113 6.921,7.873 6.871,7.829 6.827,7.779 6.587,7.595 6.528,7.566 6.473,7.529 6.193,7.413 6.129,7.4 6.066,7.379 5.766,7.34 5.7,7.344 5.634,7.34 5.334,7.379 5.272,7.4 5.207,7.413 4.927,7.529 4.872,7.566 4.813,7.595 4.573,7.779 4.529,7.829 4.48,7.873 4.295,8.113 4.266,8.172 4.229,8.227 4.113,8.507 4.101,8.571 4.079,8.634 4.04,8.934 4.044,9 4.04,9.066 4.079,9.366 4.101,9.429 4.113,9.493 4.229,9.773 4.266,9.828 4.295,9.887 4.48,10.127 4.529,10.171 4.573,10.22 4.813,10.405 4.872,10.434 4.927,10.471 5.207,10.587 5.272,10.599 5.334,10.621 5.634,10.66 5.7,10.656 5.766,10.66 6.066,10.621 6.129,10.599 6.193,10.587 6.473,10.471 6.528,10.434 6.587,10.405 6.827,10.22 6.871,10.171 6.921,10.127 7.027,9.988 11.355,9.988 11.355,11.127 11.394,11.32 11.503,11.484 11.667,11.593 11.86,11.632 13.86,11.632
  pour cut-out: 287 vertices and 0 holes, not listed, extent 30.874,1.812 56.376,23.555
  pour cut-out: 233 vertices and 0 holes, not listed, extent 30.874,23.112 56.376,26.716
  pour cut-out: 14.053,32.893 14.217,32.784 14.326,32.62 14.365,32.427 14.365,28.427 14.326,28.234 14.217,28.07 14.053,27.961 13.86,27.922 11.86,27.922 11.667,27.961 11.503,28.07 11.394,28.234 11.355,28.427 11.355,29.566 7.187,29.566 7.171,29.527 7.134,29.472 7.105,29.413 6.921,29.173 6.871,29.129 6.827,29.079 6.587,28.895 6.528,28.866 6.473,28.829 6.193,28.713 6.129,28.7 6.066,28.679 5.766,28.64 5.7,28.644 5.634,28.64 5.334,28.679 5.272,28.7 5.207,28.713 4.927,28.829 4.872,28.866 4.813,28.895 4.573,29.079 4.529,29.129 4.48,29.173 4.295,29.413 4.266,29.472 4.229,29.527 4.113,29.807 4.101,29.871 4.079,29.934 4.04,30.234 4.044,30.3 4.04,30.366 4.079,30.666 4.101,30.728 4.113,30.793 4.229,31.073 4.266,31.128 4.295,31.187 4.48,31.427 4.529,31.471 4.573,31.52 4.813,31.705 4.872,31.734 4.927,31.771 5.207,31.887 5.272,31.899 5.334,31.921 5.634,31.96 5.7,31.956 5.766,31.96 6.066,31.921 6.129,31.899 6.193,31.887 6.473,31.771 6.528,31.734 6.587,31.705 6.827,31.52 6.871,31.471 6.921,31.427 7.027,31.288 11.355,31.288 11.355,32.427 11.394,32.62 11.503,32.784 11.667,32.893 11.86,32.932 13.86,32.932

## Silkscreen, mask and mechanical layers (free items; w line width, h text height)
Top Overlay:
  drawing of 1924 lines, arcs and shapes, not listed
  text "NAVARRO" at 42.382,33.691 h1.85
  text "N" at 42.284,33.405 h9.98 r270
  text "AD8307 RF Wattmeter / PCB by: Eng. Felipe Navarro / Originally designed by OZ2CPU / Jun/2017 Rev : 1.0" at 48.6,30.6 h2
  text "S/N:" at 79.7,10.2 h1.52
Mechanical 29:
  lines w0.1: 0,0 100,0 100,40 0,40 0,0

## Text inside footprints (layer, text, board x,y; h text height)
CN2: Top Overlay "2" at 97.716,34.245 h1.6 r270; Top Overlay "1" at 91.431,34.028 h1.6 r270
CN3: Top Overlay "1" at 70.004,30.635 h1.5 r270
CN4: Top Overlay "1" at 71.977,12.652 h1.5 r90
U2: Top Overlay "1" at 81,29.8 h0.8
U4: Mechanical 15 "1" at 51.407,19.403 h1 r90; Mechanical 15 "2" at 51.357,21.243 h1 r90; Mechanical 15 "3" at 49.132,20.286 h1 r90